# Altium PCB PCB1.PcbDoc
Units mil, origin at the board's own origin, x right, y up, seen from the top; angles counter-clockwise.
Board outline 3185 x 2770 mil, 2 copper layers (Top Layer, Bottom Layer); 31 components, 26 nets, 112 pads, 4 vias.
Unrouted connection lines stored in the file: 1.
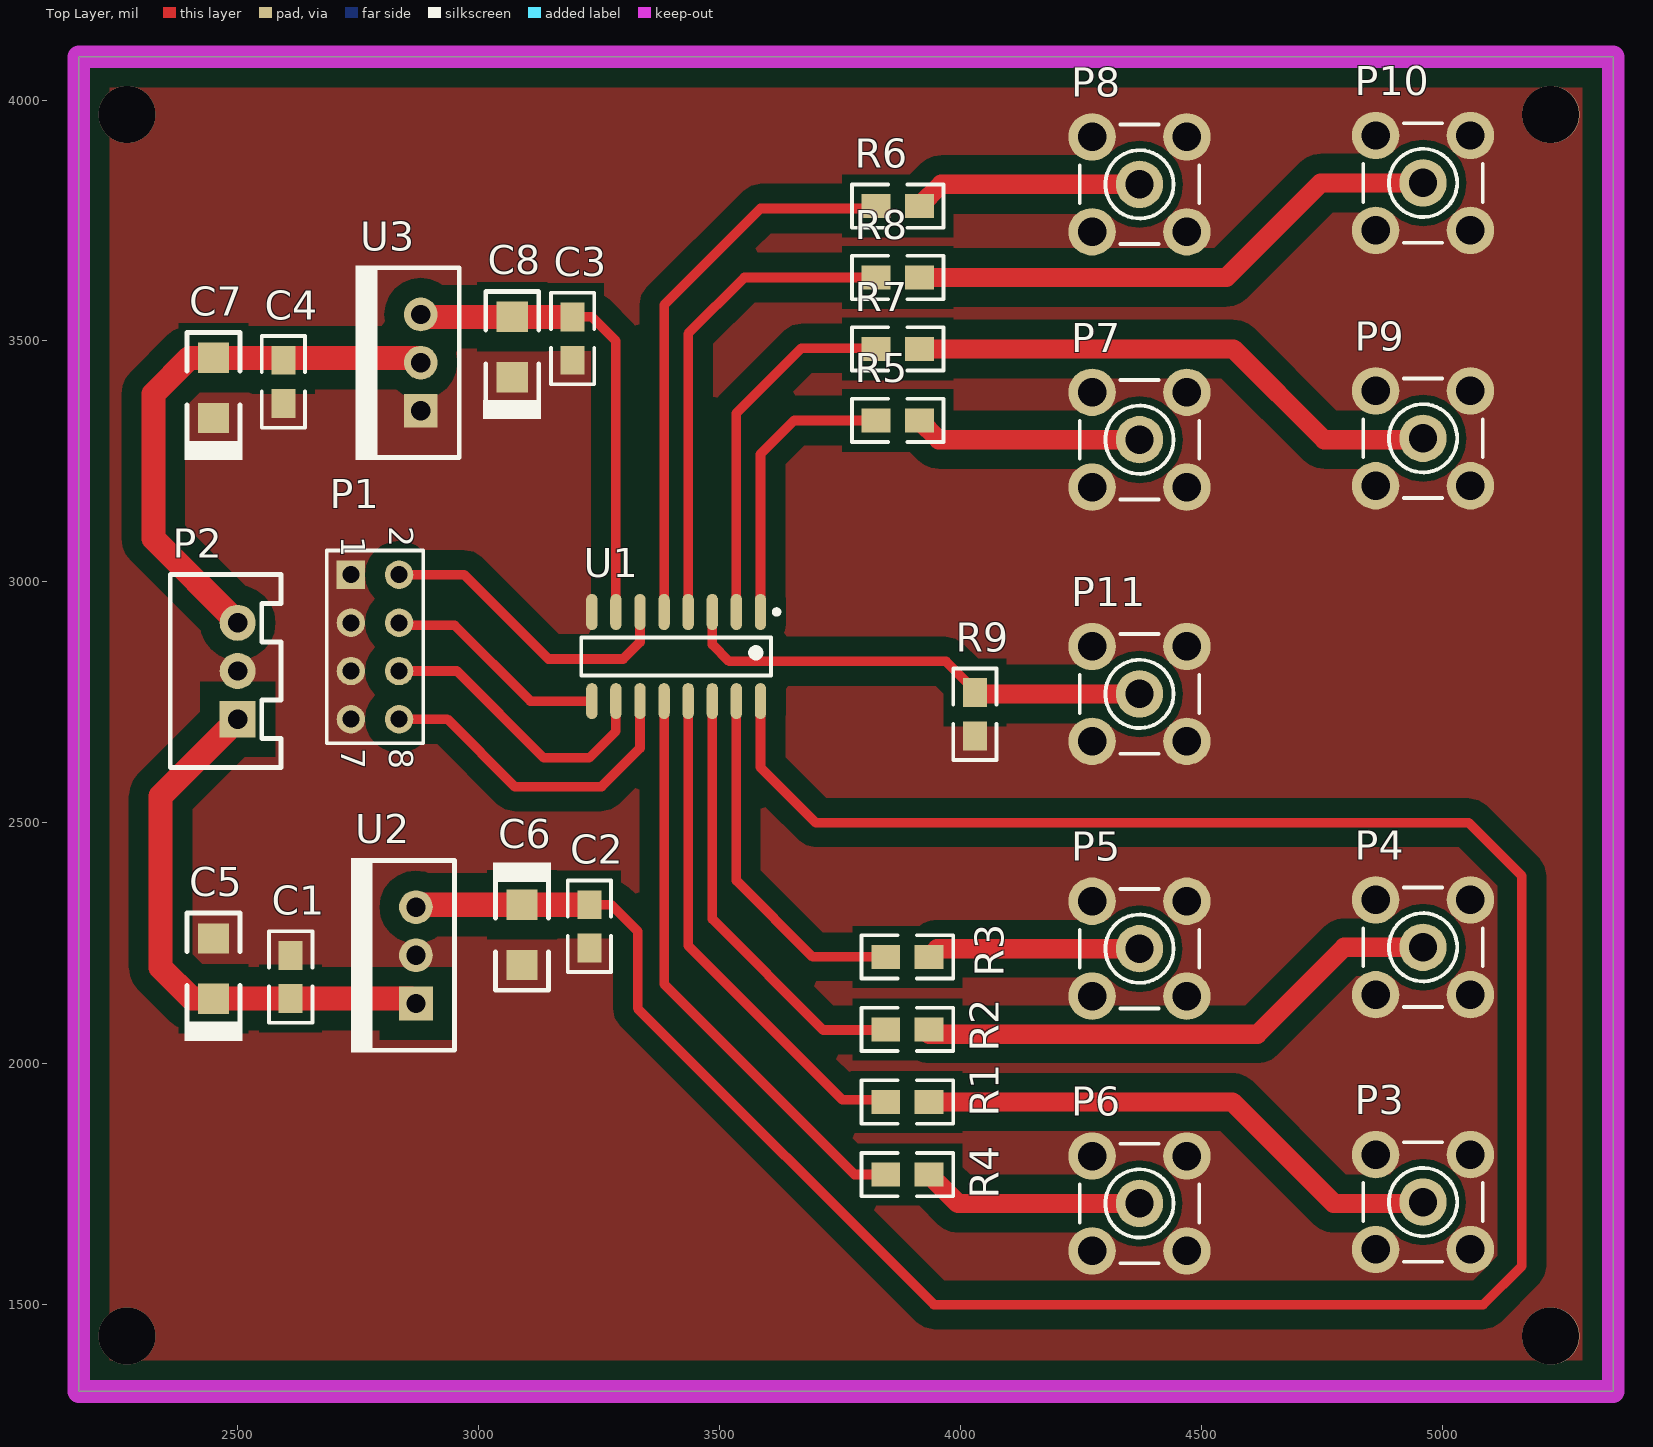
[diagram p0: Top Layer view]
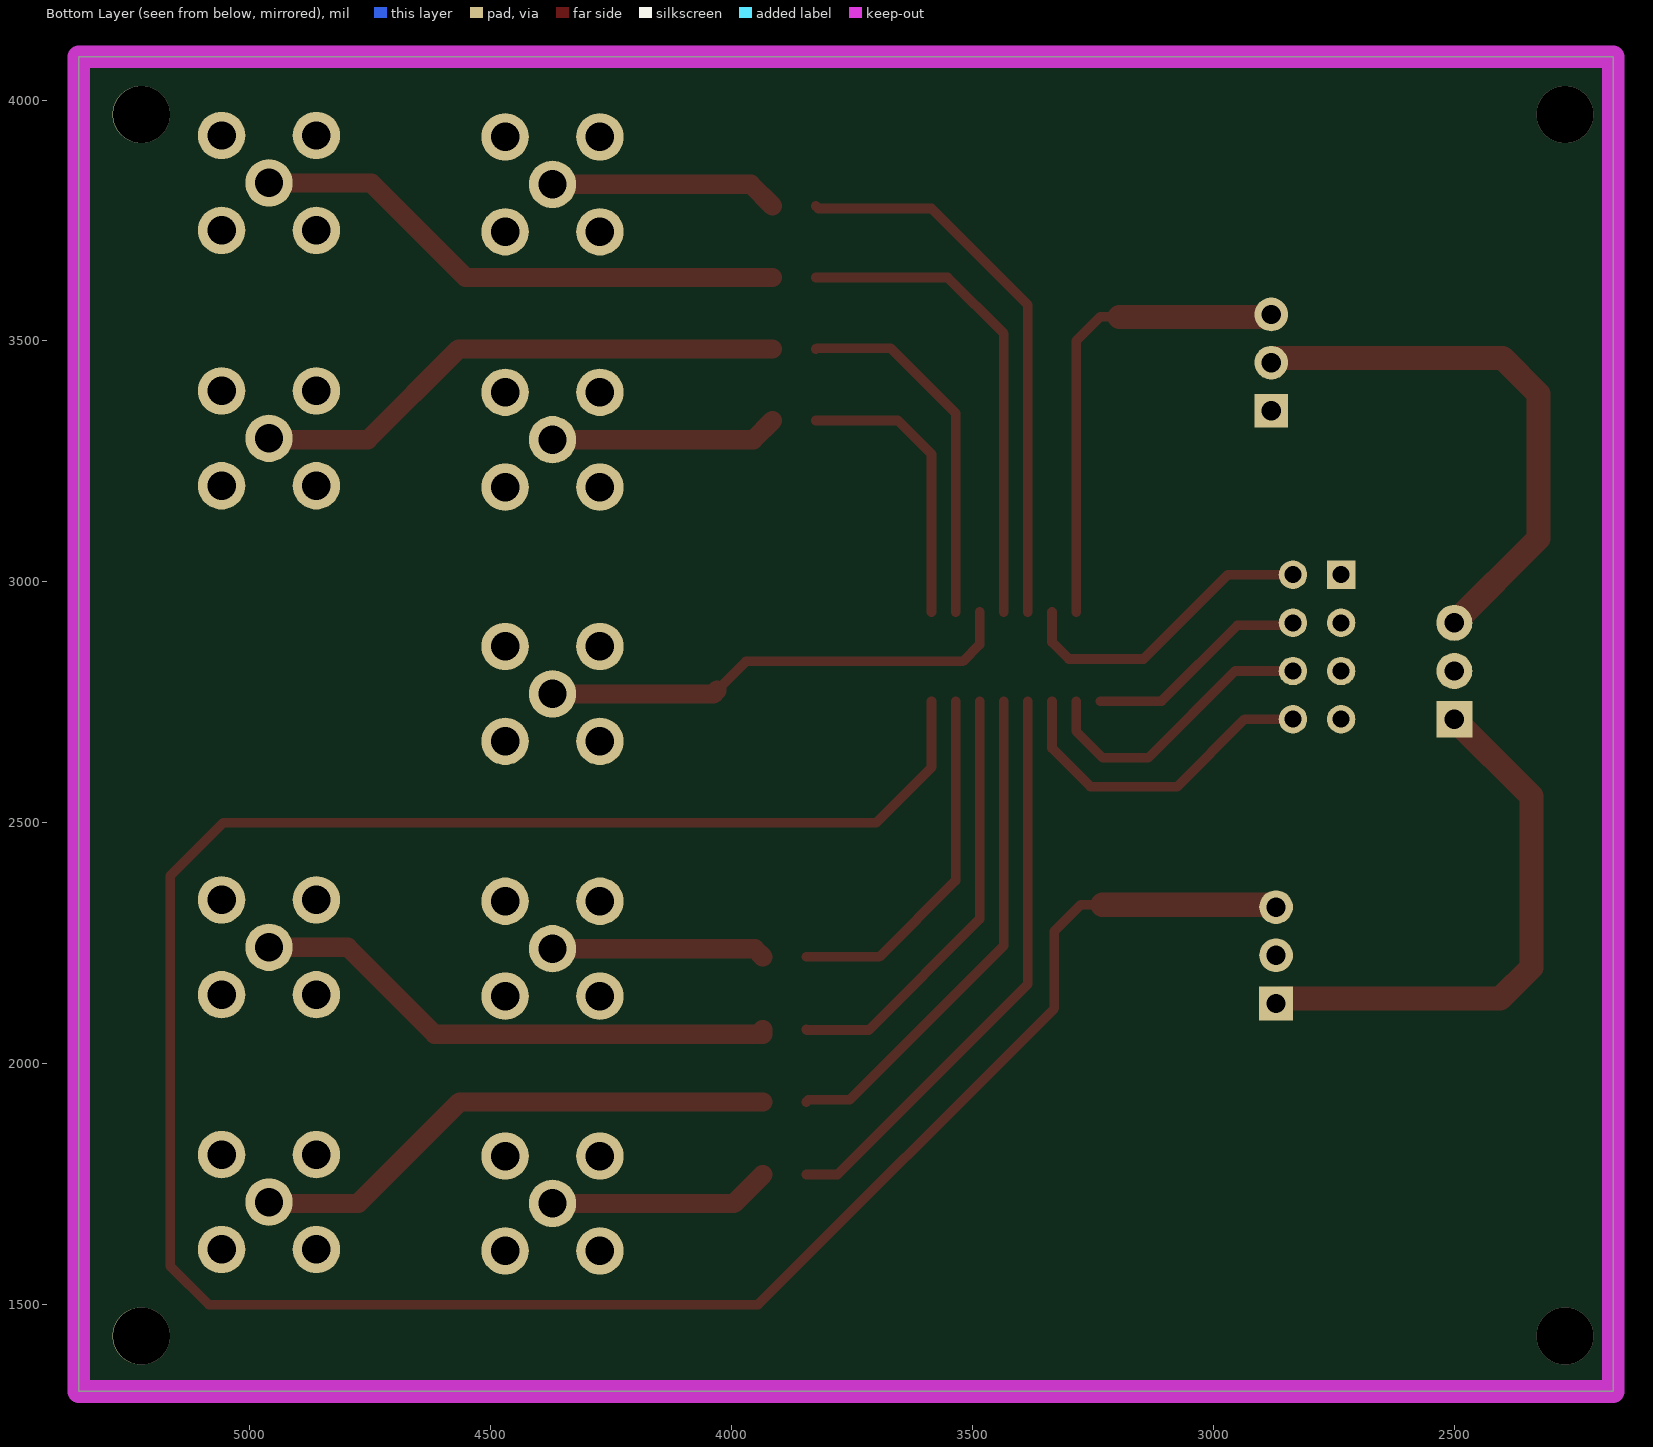
[diagram p1: Bottom Layer view, seen from below]

## Layer stack, top to bottom
Top Solder: solder mask 0.4, Solder Resist, Dk 3.5
Top Layer: signal copper 1.4
Dielectric 1: dielectric 12.6, FR-4, Dk 4.8
Bottom Layer: signal copper 1.4
Bottom Solder: solder mask 0.4, Solder Resist, Dk 3.5

## Board outline
2170,1320 2170,4090 5355,4090 5355,1320

## Design rules (kind name [scope] priority, off if disabled: settings)
Clearance [All] p1: gap=10 except(40: Arc-Fill Arc-Poly Track-Fill Track-Poly SMDPad-Fill SMDPad-Poly THPad-Fill THPad-Poly Via-Fill Via-Poly Fill-Fill Fill-Poly Poly-Poly)
PlaneConnect [All] p1: planeconnectstyle=Direct reliefexpansion=20 reliefentries=4 reliefconductorwidth=10 reliefairgap=10
PolygonConnect [All] p1: connectstyle=Direct reliefconductorwidth=10 reliefentries=4 polygonreliefangle="90 Angle" airgapwidth=10
RoutingVias [All] p1: holewidth=28 width=50 viastyle="Through Hole" minholewidth=28 minwidth=50 maxholewidth=28 maxwidth=50
SolderMaskExpansion [All] p1: expansion=4
Width [All] p1: maxlimit=90 minlimit=10 preferedwidth=10
29 further rules are at their usual default settings.

## Components (designator, comment, footprint, x,y, rotation, side; value= is the part's Value field where it differs from the comment)
C1 "0.1uf" 0805 2610,2225 r270 top
C2 "0.1uf" 0805 3230,2240 r90 top
C3 "0.1uf" 0805 3195,3460 r90 top
C4 "0.1uf" 0805 2595,3460 r270 top
C5 "Cap" 3216C-TYPE_A 2450,2135 r270 top
C6 "Cap" 3216C-TYPE_A 3090,2330 r90 top
C7 "Cap" 3216C-TYPE_A 2450,3340 r270 top
C8 "Cap" 3216C-TYPE_A 3070,3425 r270 top
P1 "Header 4X2" HDR2X4 2735,3015 r270 top
P2 "XH2.54-3p" XH2.54-3p 2500,2715 r90 top
P3 "SMB" SMB_V-RJ45 4960,1712.92 r90 top
P4 "SMB" SMB_V-RJ45 4960,2241.67 r90 top
P5 "SMB" SMB_V-RJ45 4371.57,2238.75 r90 top
P6 "SMB" SMB_V-RJ45 4371.57,1710 r90 top
P7 "SMB" SMB_V-RJ45 4371.57,3295 r90 top
P8 "SMB" SMB_V-RJ45 4371.57,3825 r90 top
P9 "SMB" SMB_V-RJ45 4960,3297.92 r90 top
P10 "SMB" SMB_V-RJ45 4960,3827.92 r90 top
P11 "SMB" SMB_V-RJ45 4371.57,2767.5 r90 top
R1 "49R9" 0805 3845,1920.56 r0 top
R2 "49R9" 0805 3845,2071.11 r0 top
R3 "49R9" 0805 3845,2221.67 r0 top
R4 "49R9" 0805 3845,1770 r0 top
R5 "49R9" 0805 3825,3335 r0 top
R6 "49R9" 0805 3825,3780 r0 top
R7 "49R9" 0805 3825,3483.33 r0 top
R8 "49R9" 0805 3825,3631.67 r0 top
R9 "49R9" 0805 4030,2680 r90 top
U1 "74HC4052" TI-D16_L 3410,2845 r270 top
U2 "78XX" TO-220 2870,2125 r90 top
U3 "79XX" TO-220 2880,3355 r90 top

## Footprints (in the part's own frame and the unit in brackets; to place one, negate y for a bottom-side part, rotate by r counter-clockwise, add the part's x,y. Pads: shape width x height; smd on the part's side, far side on the other; paste and mask are expansions set on the pad)
0805 [mil]
  rect 60x50 smd: 1(0,0) 2(90,0)
  silkscreen extent -50,-45 140,45
3216C-TYPE_A [mm]
  rect 1.6x1.65 smd: 1(0,0) 2(-3.175,0)
  silkscreen extent -4.51,-1.54 2.22,1.52
HDR2X4 [mm] "Connector; Header; 4x2 Position"
  rect 1.5x1.5 hole 0.9: 1(0,0)
  round 1.5 hole 0.9: 2(0,2.54) 3(2.54,0) 4(2.54,2.54) 5(5.08,0) 6(5.08,2.54) 7(7.62,0) 8(7.62,2.54)
  silkscreen extent -1.27,-1.27 8.89,3.81
SMB_V-RJ45 [mm] "Connector; SMB Straight"
  round 2.5 hole 1.5: 1(0,0) 2(-2.5,-2.5) 2(-2.5,2.5) 2(2.5,-2.5) 2(2.5,2.5)
  silkscreen extent -3.15,-3.15 3.15,3.15
TI-D16_L [mm] "SOIC, 16-Leads, Body 9.9x3.9mm, Pitch 1.27mm, IPC High Density"
  oval 1.9x0.6 smd: 1(-2.35,4.445) 2(-2.35,3.175) 3(-2.35,1.905) 4(-2.35,0.635) 5(-2.35,-0.635) 6(-2.35,-1.905) 7(-2.35,-3.175) 8(-2.35,-4.445) 9(2.35,-4.445) 10(2.35,-3.175) 11(2.35,-1.905) 12(2.35,-0.635) 13(2.35,0.635) 14(2.35,1.905) 15(2.35,3.175) 16(2.35,4.445)
  silkscreen extent -2.47,-5 1,5.42, body extent -2,-5 2,5, height 1.75
TO-220 [mil]
  rect 70x70 hole 40: 1(0,0)
  round 70 hole 40: 2(100,0) 3(200,0)
  silkscreen extent -102,-80 302,135
XH2.54-3p [mil]
  rect 75x75 hole 40: 1(0,0)
  round 75 hole 40: 2(100,0) 3(200,0)
  silkscreen extent -100,-90 300,140

## Part data
C1 C2 C3 C4: library part Cap
C5 C6 C7 C8: library part "Tantalium Cap"
P1: "Header, 4-Pin, Dual row"
P3 P4 P5 P6 P7 P8 P9 P10 P11: "SMB Straight Connector"
R1 R2 R3 R4 R5 R6 R7 R8 R9: library part Res

## Via types
v1: diameter 118.5, hole 118.11, Top Layer to Bottom Layer, 4 vias

## Nets (pads, with @x,y where several pads share a name; then routed paths per layer and width w, separated by ;. In a path a pad name is that pad's centre, name@x,y a point inside that pad or via, vN(x,y) a via of type N, cw(c..) or ccw(c..) an arc to the next point about the centre after c; other vN are vias at no path point)
5V: C2.2 C6.1 U1.16 U2.3 | length 5388.4
  Top Layer w20: C2.2 3275,2330 3330,2275 3330,2115 3945,1500 5085,1500 5165,1580 5165,2390 5055,2500 3700,2500 3585,2615 U1.16
  Top Layer w50: U2.3 2875,2330 C6.1 C2.2
-5V: C3.2 C8.2 U1.7 U3.3 | length 988.2
  Top Layer w20: C3.2 3235,3550 3285,3500 U1.7
  Top Layer w50: U3.3@2880,3550 C8.2 C3.2
GND: C1.1 C2.1 C3.1 C4.2 C5.2 C6.2 C7.1 C8.1 P1.1 P1.3 P1.5 P1.7 P2.2 P3.2 P4.2 P5.2 P6.2 P7.2 P8.2 P9.2 P10.2 P11.2 R9.1 U1.8 U2.2 U3.1
  other v1: 2270,1435 5225,1435 2270,3970 5225,3970
NetC1_2: C1.2 C5.1 P2.1 U2.1 | length 1142.3
  Top Layer w50: P2.1 2340,2555 2340,2200 2405,2135 C5.1 C1.2 2860,2135 U2.1
NetC4_1: C4.1 C7.2 P2.3 U3.2 | length 1137.7
  Top Layer w50: P2.3 2325,3090 2325,3390 2400,3465 C7.2 2870,3465 U3.2
NetP1_2: P1.2 U1.6 | length 649.5
  Top Layer w20: P1.2 2970,3015 3145,2840 3300,2840 3335,2875 U1.6
NetP1_4: P1.8 U1.11 | length 688.6
  Top Layer w20: P1.8 2935,2715 3075,2575 3255,2575 3335,2655 U1.11
NetP1_6: P1.6 U1.10 | length 609.8
  Top Layer w20: P1.6 2955,2815 3135,2635 3230,2635 3285,2690 U1.10
NetP1_8: P1.4 U1.9 | length 467.3
  Top Layer w20: P1.4 2840,2910 2950,2910 3107.52,2752.48 U1.9
NetP3_1: P3.1 R1.2 | length 1113.4
  Top Layer w40: R1.2 4564.44,1920.56 4775,1710 4957.08,1710 P3.1
NetP4_1: P4.1 R2.2 | length 1109.8
  Top Layer w40: R2.2 3935,2061.11 4616.11,2061.11 4796.67,2241.67 P4.1
NetP5_1: P5.1 R3.2 | length 443.7
  Top Layer w40: R3.2 3952.08,2238.75 P5.1
NetP6_1: P6.1 R4.2 | length 461.4
  Top Layer w40: R4.2 3995,1710 P6.1
NetP7_1: P7.1 R5.2 | length 473.1
  Top Layer w40: R5.2 3955,3295 P7.1
NetP8_1: P8.1 R6.2 | length 475.2
  Top Layer w40: R6.2 3960,3825 P8.1
NetP9_1: P9.1 R7.2 | length 1124.2
  Top Layer w40: R7.2 4566.67,3483.33 4755,3295 4957.08,3295 P9.1
NetP10_1: P10.1 R8.2 | length 1126.3
  Top Layer w40: R8.2 4551.67,3631.67 4747.92,3827.92 P10.1
NetP11_1: P11.1 R9.2 U1.3 | length 996.6
  Top Layer w20: U1.3 3485,2870 3520,2835 3970,2835 R9.2@4030,2775
  Top Layer w40: R9.2@4030,2775 4037.5,2767.5 P11.1
NetR1_1: R1.1 U1.13 | length 1051.9
  Top Layer w20: U1.13 3435,2245 3755,1925 3840.56,1925 R1.1
NetR2_1: R2.1 U1.14 | length 908.2
  Top Layer w20: U1.14 3485,2300 3715,2070 3843.89,2070 R2.1
NetR3_1: R3.1 U1.15 | length 748.1
  Top Layer w20: U1.15 3535,2380 3693.33,2221.67 R3.1
NetR4_1: R4.1 U1.12 | length 1211.1
  Top Layer w20: U1.12 3385,2165 3780,1770 R4.1
NetR5_1: R5.1 U1.1 | length 596.5
  Top Layer w20: U1.1 3585,3265 3655,3335 R5.1
NetR6_1: R6.1 U1.5 | length 1162.4
  Top Layer w20: U1.5 3385,3575 3585,3775 3820,3775 R6.1
NetR7_1: R7.1 U1.2 | length 759.1
  Top Layer w20: U1.2 3535,3350 3670,3485 3823.33,3485 R7.1
NetR8_1: R8.1 U1.4 | length 1015.8
  Top Layer w20: U1.4 3435,3515 3551.67,3631.67 R8.1

## Polygon pours and split planes (outlines as drawn)
GND on Top Layer "Top Layer-No Net" (solid, pour order 0): 2170,1320 5355,1320 5355,4090 2170,4090

## Keep-outs
Keep-Out Layer:
  the board outline again, w47.24

## Text inside footprints (layer, text, board x,y; h text height)
P1: Top Overlay "2" at 2815,3115 h50 r270; Top Overlay "1" at 2715,3095 h50 r270; Top Overlay "7" at 2715,2655 h50 r270; Top Overlay "8" at 2815,2655 h50 r270